# Altium PCB v12.PcbDoc
Units mm, origin at the board's own origin, x right, y up, seen from the top; angles counter-clockwise.
Board outline 50 x 55.55 mm, 2 copper layers (Top Layer, Bottom Layer); 77 components, 53 nets, 241 pads, 42 vias.
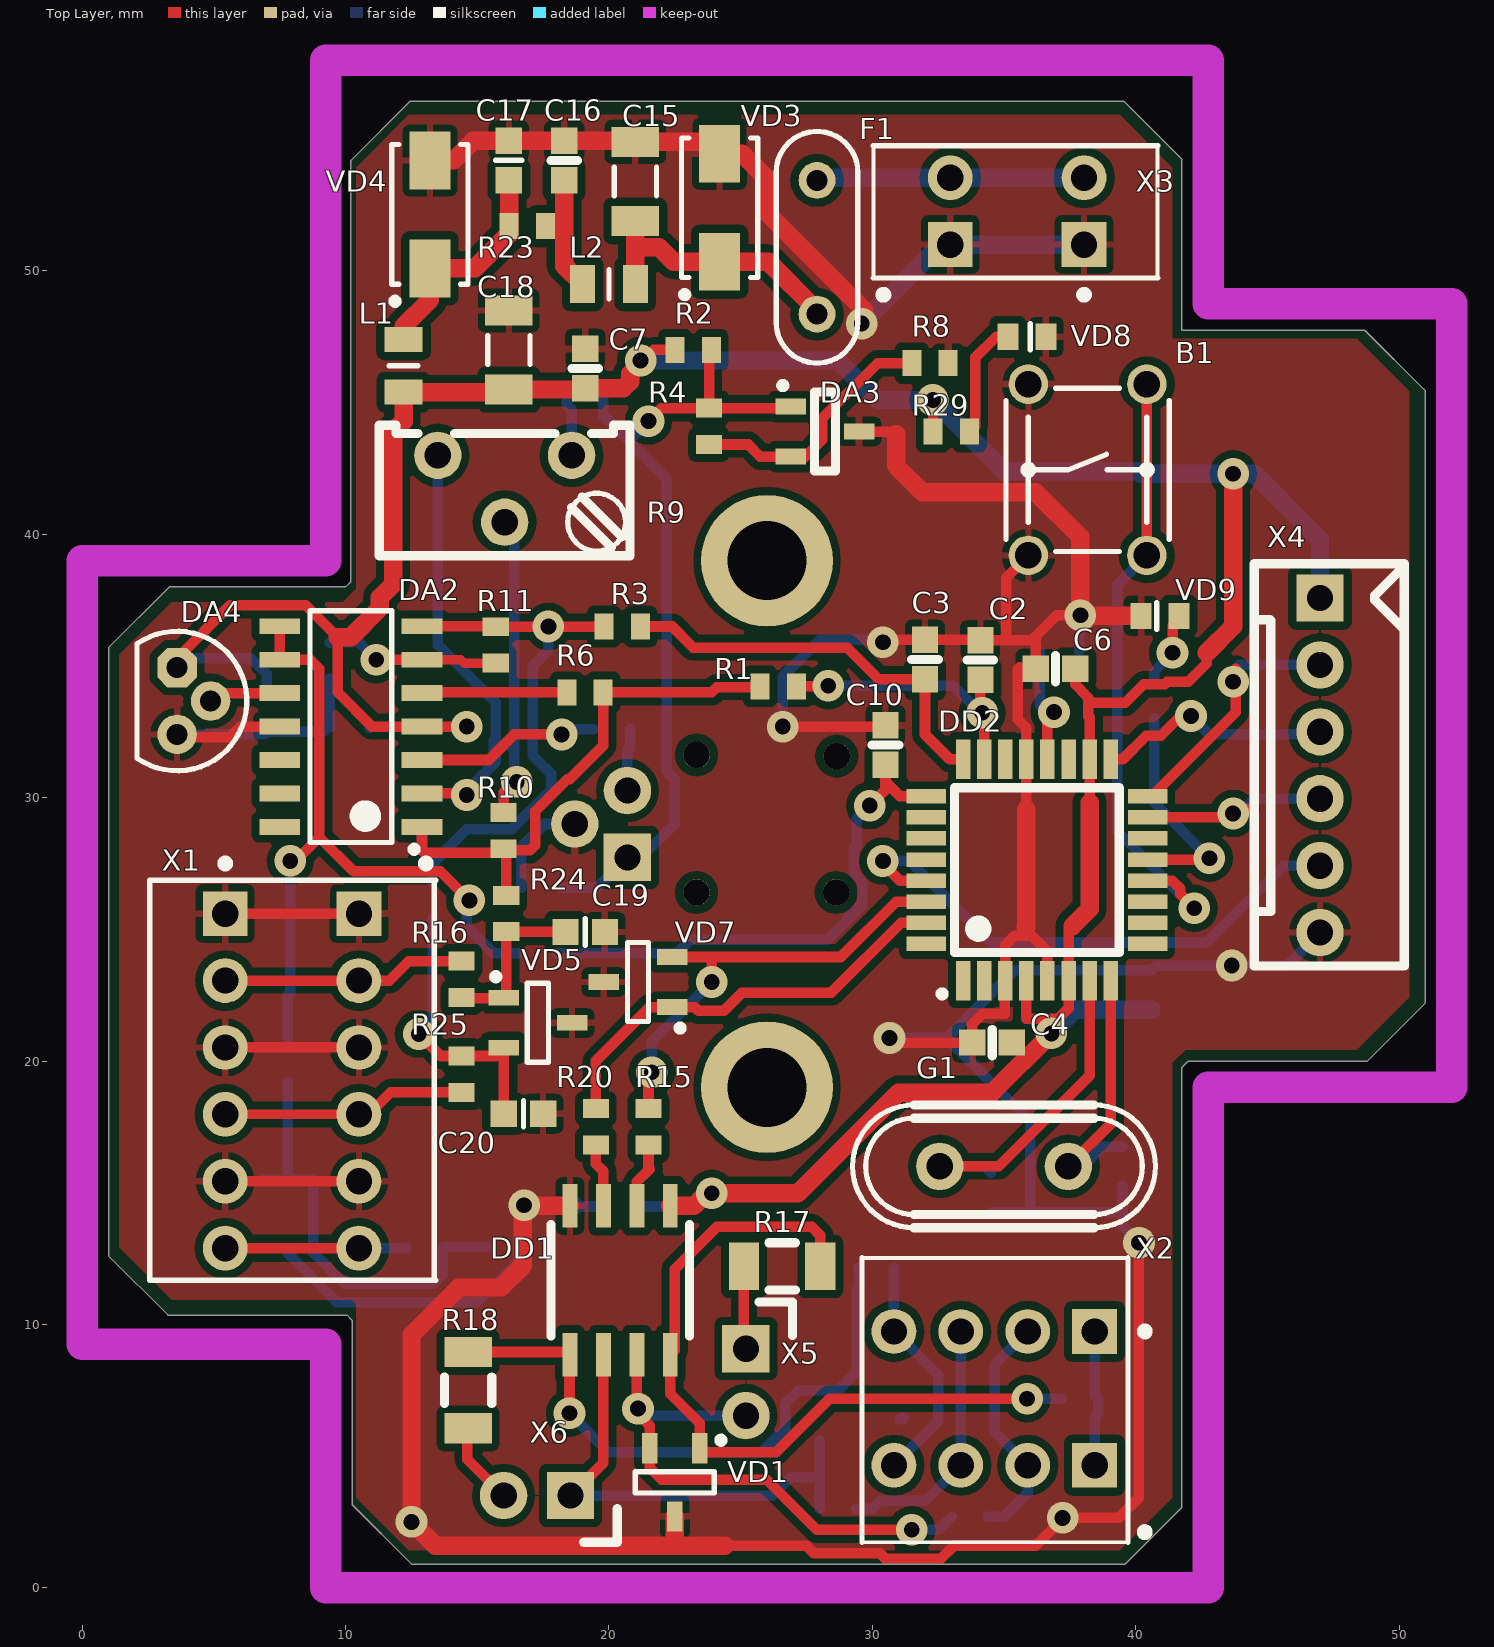
[diagram p0: Top Layer view]
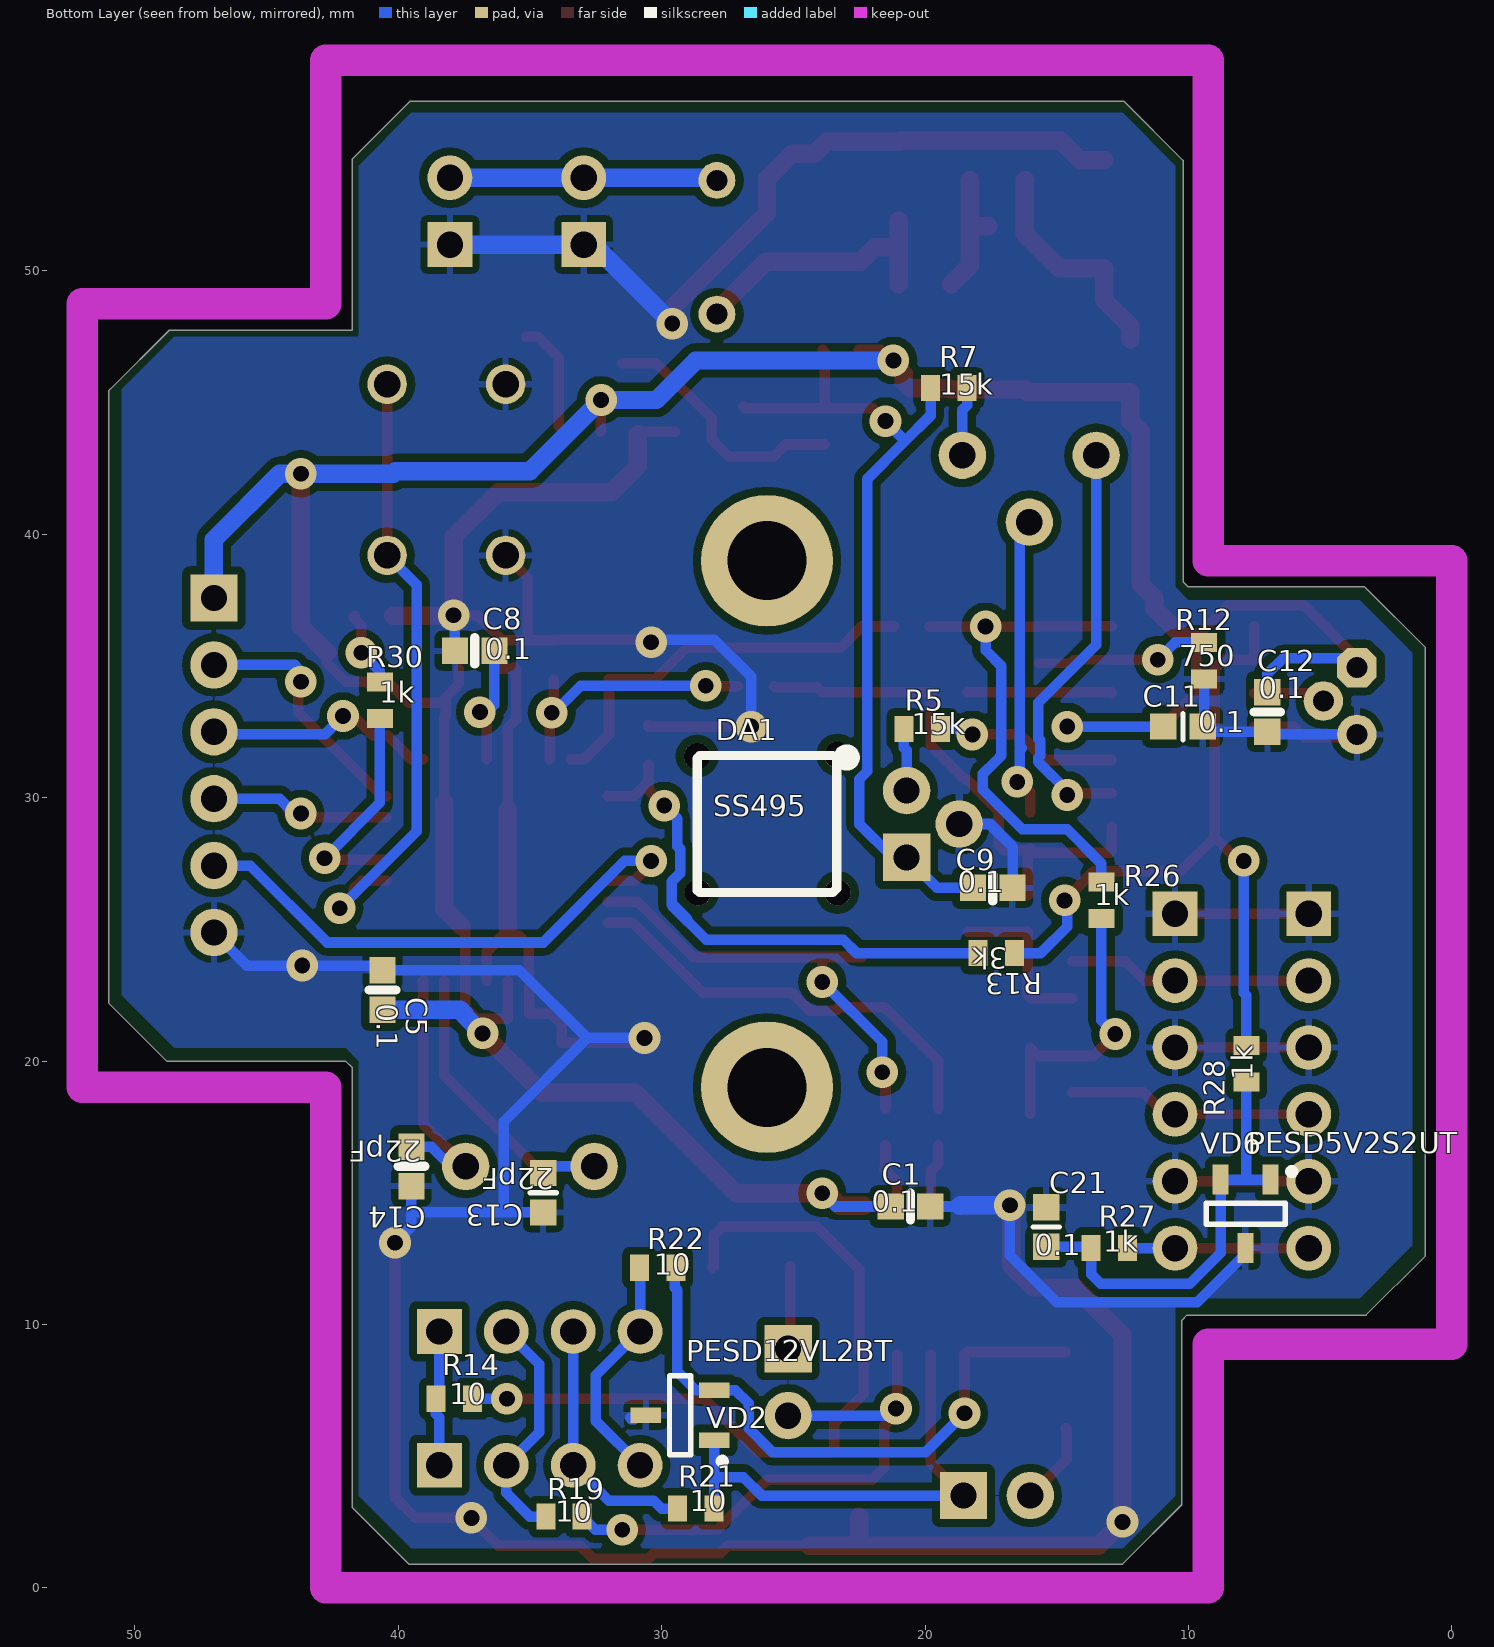
[diagram p1: Bottom Layer view, seen from below]
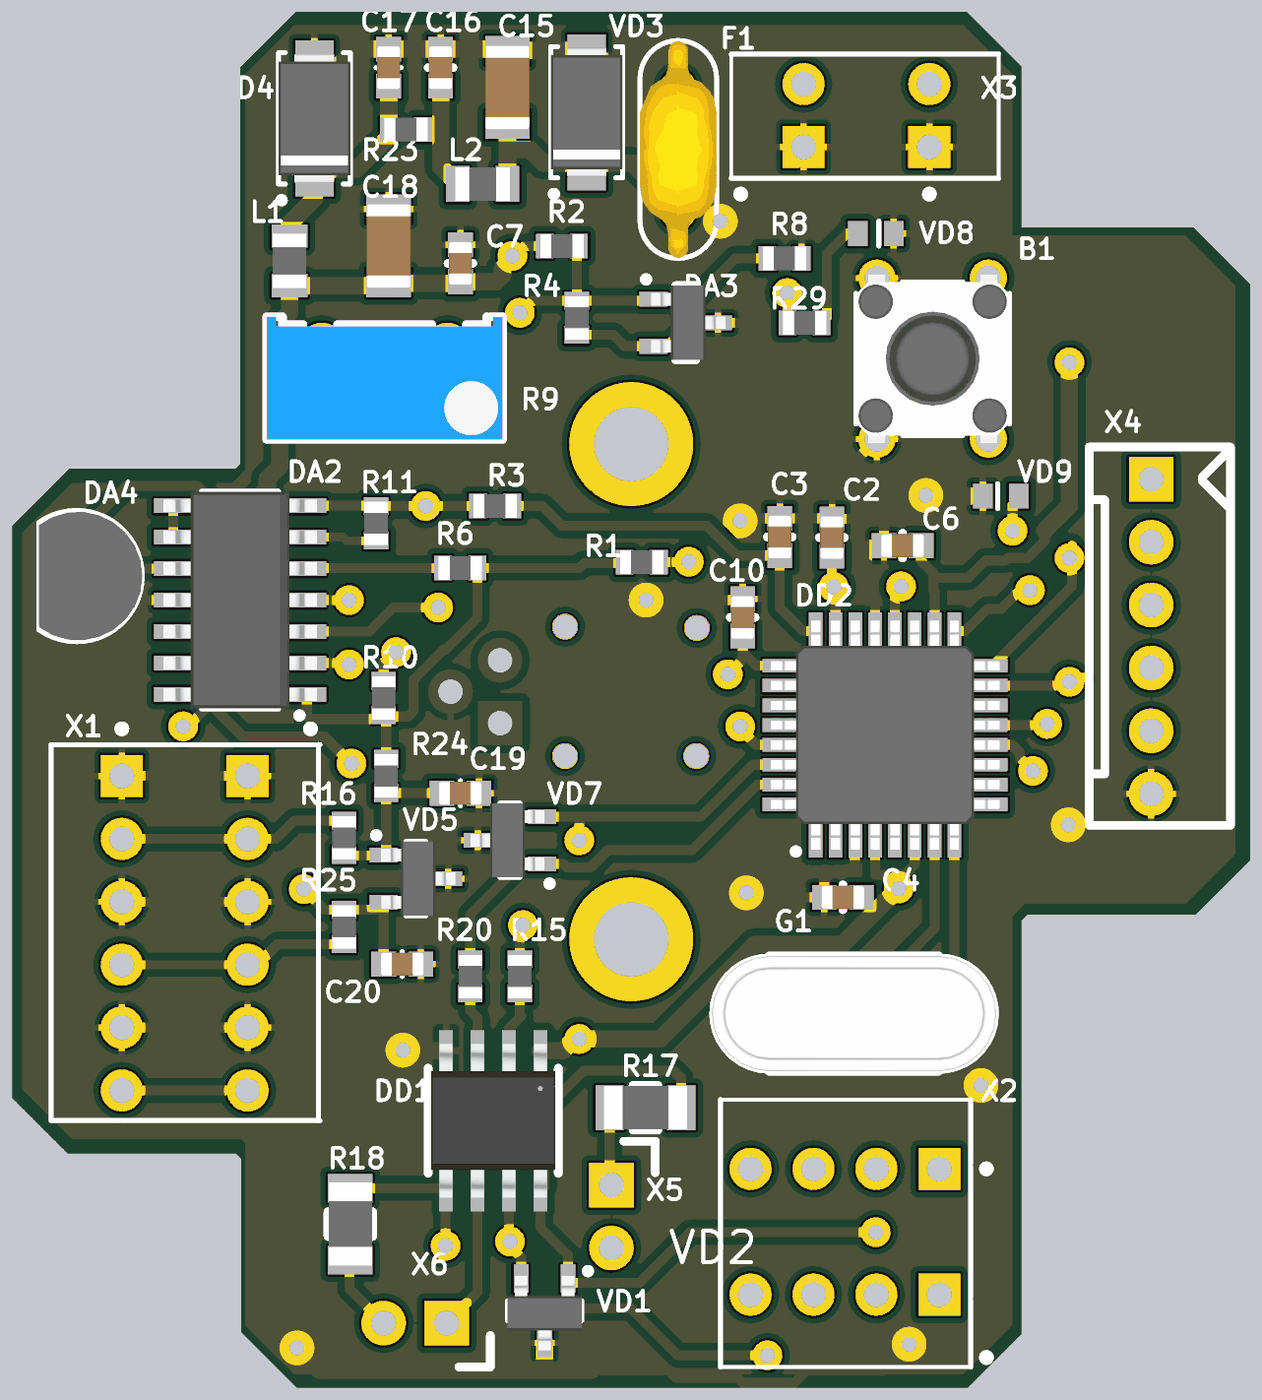
[diagram p2: 3D render of the assembled board from above, using the file's embedded part models]
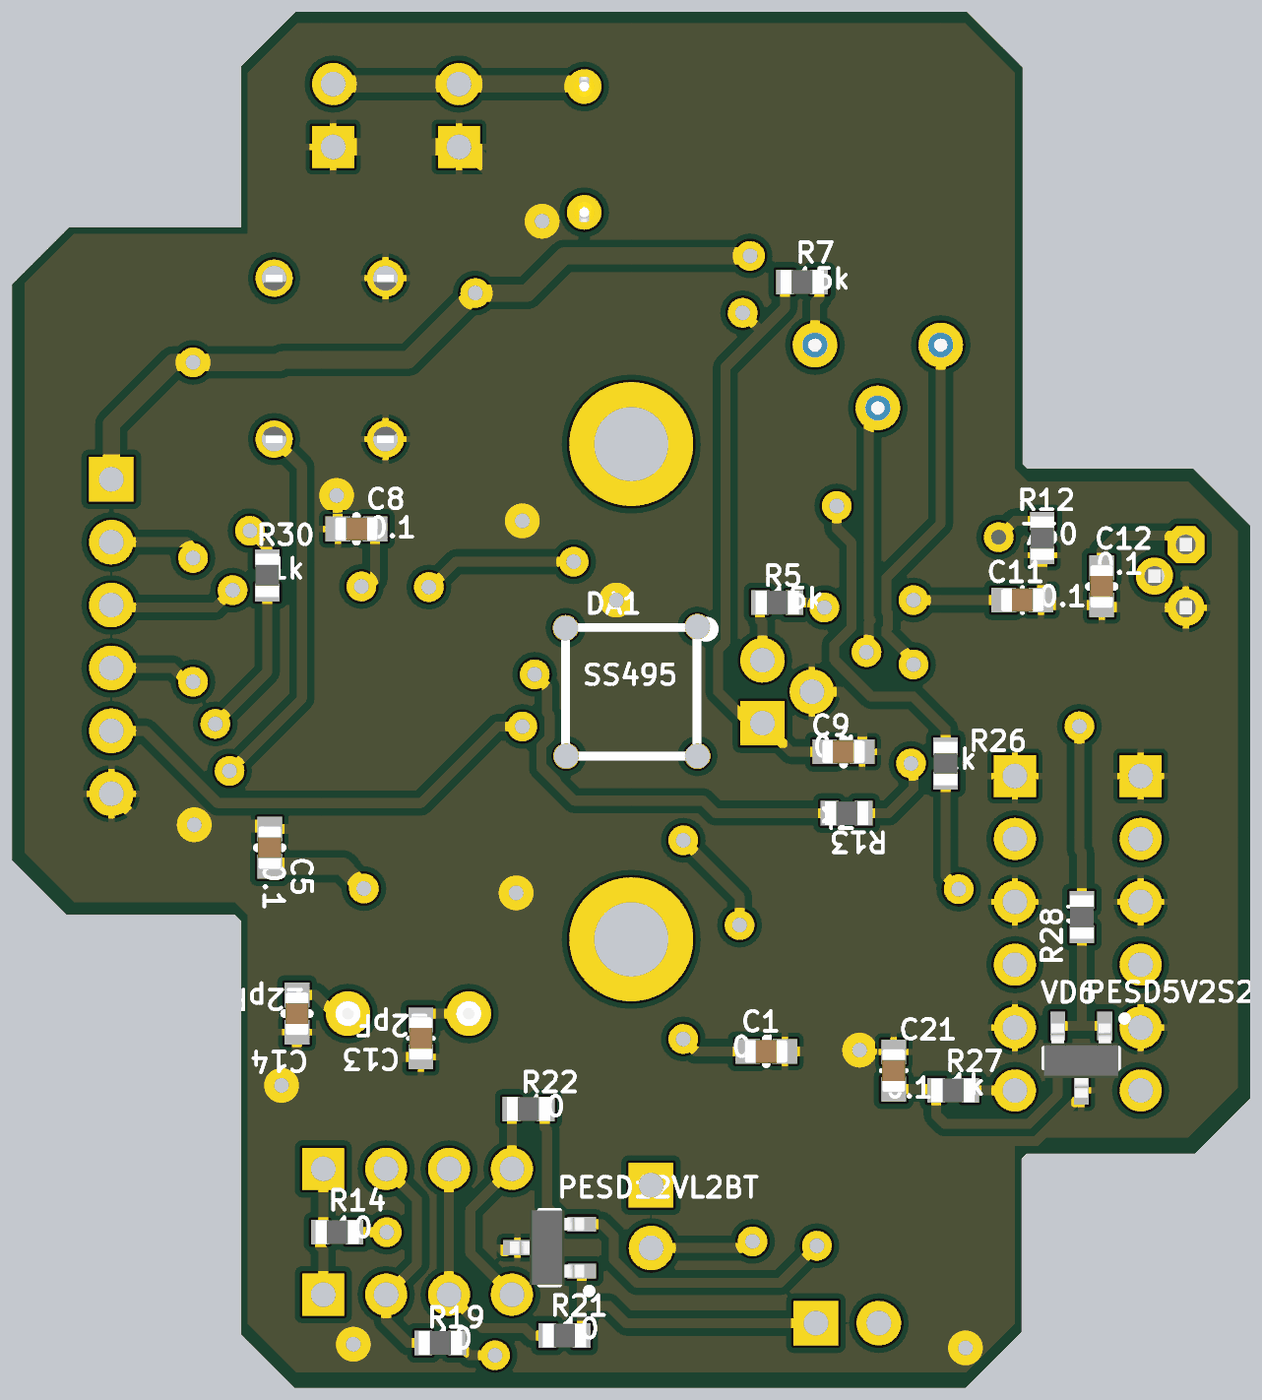
[diagram p3: 3D render of the assembled board from below, using the file's embedded part models]

## Layer stack, top to bottom
Top Solder: solder mask 0.0102, Solder Resist, Dk 3.5
Top Layer: signal copper 0.0356
Dielectric 1: dielectric 0.32, FR-4, Dk 4.8
Bottom Layer: signal copper 0.0356
Bottom Solder: solder mask 0.0102, Solder Resist, Dk 3.5

## Board outline
10.25,3.5 10.25,10.15 10.05,10.35 3.25,10.35 1,12.6 1,35.7 3.25,37.95 3.3,38 10,38 10.2,38.2 10.2,54.2 12.45,56.45 39.546,56.45 41.75,54.246 41.75,47.75 48.7,47.75 50.95,45.5 51,45.45 51,22.2 48.8,20 42,20 41.75,19.75 41.75,3.05 39.6,0.9 12.5,0.9 10.25,3.15

## Design rules (kind name [scope] priority, off if disabled: settings)
Clearance Multy [OnLayer('Multi-Layer')] p1: gap=0.3 ignorepadtopadclearanceinfootprint=TRUE except(0: Arc-Text Arc-Hole Track-Text Track-Hole SMDPad-Text SMDPad-Hole THPad-Text THPad-Hole Via-Text Via-Hole Fill-Text Fill-Hole Poly-Text Poly-Hole Region-Text Region-Hole Text-Text Text-Hole)
Clearance SameBott [All] p2 off: gap=0 ignorepadtopadclearanceinfootprint=TRUE except(0.1: SMDPad-Via THPad-Via Via-Via; 0.5: SMDPad-SMDPad SMDPad-THPad THPad-THPad)
Clearance SameTop [OnLayer('Top Layer') vs OnLayer('Top Layer')] p3 off: gap=0 ignorepadtopadclearanceinfootprint=TRUE except(0.1: SMDPad-Via THPad-Via Via-Via; 0.5: SMDPad-THPad THPad-THPad)
Clearance DiffBott [OnLayer('Bottom Layer') vs OnLayer('Bottom Layer')] p4: gap=0.3 ignorepadtopadclearanceinfootprint=TRUE except(0: Arc-Hole Track-Hole SMDPad-Text SMDPad-Hole THPad-Text THPad-Hole Via-Text Via-Hole Fill-Text Fill-Hole Poly-Text Poly-Hole Region-Text Region-Hole Text-Text Text-Hole; 0.5: SMDPad-SMDPad SMDPad-THPad THPad-THPad)
Clearance DiffTop [OnLayer('Top Layer') vs OnLayer('Top Layer')] p5: gap=0.3 ignorepadtopadclearanceinfootprint=TRUE except(0: Arc-Text Arc-Hole Track-Text Track-Hole SMDPad-Text SMDPad-Hole THPad-Text THPad-Hole Via-Text Via-Hole Fill-Text Fill-Hole Poly-Text Poly-Hole Region-Text Region-Hole Text-Text Text-Hole; 0.5: SMDPad-SMDPad SMDPad-THPad THPad-THPad)
ComponentClearance [InComponent('No Component') And OnLayer('Top Layer') vs InComponent('No Component') And OnLayer('Top Layer')] p1: gap=0.254 collisioncheckmode=3 verticalgap=0.254 showdistances=FALSE
PlaneConnect [All] p1: pad.planeconnectstyle=Relief pad.reliefexpansion=0.508 pad.reliefentries=4 pad.reliefconductorwidth=0.254 pad.reliefairgap=0.254 via.planeconnectstyle=Direct via.reliefexpansion=0.508 via.reliefentries=4 via.reliefconductorwidth=0.254 via.reliefairgap=0.254
PolygonConnect [All] p1: thpad.connectstyle=Relief thpad.reliefconductorwidth=0.254 thpad.reliefentries=4 thpad.polygonreliefangle="90 Angle" thpad.airgapwidth=0.254 smdpad.connectstyle=Relief smdpad.reliefconductorwidth=0.254 smdpad.reliefentries=4 smdpad.polygonreliefangle="90 Angle" smdpad.airgapwidth=0.254 via.connectstyle=Direct via.reliefconductorwidth=0.254 via.reliefentries=4 via.polygonreliefangle="90 Angle" via.airgapwidth=0.254
RoutingVias [All] p1: holewidth=0.6 width=1.2 viastyle="Through Hole" minholewidth=0.6 minwidth=1.2 maxholewidth=1 maxwidth=1.6
SolderMaskExpansion [All] p1: expansion=0.102
Width [All] p1: maxlimit=0.7 minlimit=0.2 preferedwidth=0.4 minimp=50.000000 maximp=50.000000 favimp=50.000000
28 further rules are at their usual default settings.

## Components (designator, comment, footprint, x,y, rotation, side; value= is the part's Value field where it differs from the comment)
B1 "~CALIBRTE" DIP_4-450_PB_OMRON_B3F-1070 38.175,42.45 r270 top locked
C1 "0.1" CAPC1608X85N 20.55,14.475 r0 bottom locked
C2 "0.1" CAPC1608X85N 34.104,35.225 r270 top locked
C3 "0.1" CAPC1608X85N 32,35.25 r270 top locked
C4 "0.1" CAPC1608X85N 34.55,20.7 r0 top locked
C5 "0.1" CAPC1608X85N 40.6,22.7 r270 bottom locked
C6 "0.1" CAPC1608X85N 36.959,34.9 r0 top locked
C7 "0.1" CAPC1608X85N 19.1,46.3 r270 top locked
C8 "0.1" CAPC1608X85N 37.1,35.575 r180 bottom locked
C9 "0.1" CAPC1608X85N 17.425,26.575 r0 bottom locked
C10 "0.1" CAPC1608X85N 30.5,32 r270 top locked
C11 "0.1" CAPC1608X85N 10.2,32.7 r0 bottom locked
C12 "0.1" CAPC1608X85N 7,33.25 r90 bottom locked
C13 "22pF" CAPC1608X85N 34.5,15 r90 bottom locked
C14 "22pF" CAPC1608X85N 39.5,16 r90 bottom locked
C15 "10.0" CAPC3216X152N 21,53.4 r270 top locked
C16 "0.1" CAPC1608X85N 18.3,54.2 r270 top locked
C17 "0.1" CAPC1608X85N 16.2,54.2 r270 top locked
C18 "10.0" CAPC3216X152N 16.2,47 r270 top locked
C19 "0.1" CAPC1608X85N 19.1,24.9 r180 top locked
C20 "0.1" CAPC1608X85N 16.75,18 r180 top locked
C21 "0.1" CAPC1608X85N 15.4,13.7 r270 bottom locked
DA1 "SS495" "TO92H_3-127L - spec1" 26,29 r0 bottom locked
DA2 "AD8544AR" SOIC_14-127 10.2,32.7 r180 top locked
DA3 "TL431DBZ" SOT23-95 28.2,43.9 r0 top locked
DA4 "TMP36" TO-92AA-P127 3.6,33.67 r270 top locked
DD1 "ADM4854" SOIC8 20.425,11.675 r270 top locked
DD2 "ATMEGA8-16AU" TQFP_32-80 36.25,27.25 r90 top locked
F1 "MF-R010" MF-R-508 27.9,50.9 r270 top locked value=10
G1 "12MHz" XTAL_HC-49/U 35,16 r180 top locked
L1 "1k" RESC2012X50N 12.2,46.4 r270 top locked
L2 "1k" RESC2012X50N 20,49.5 r180 top locked
R1 "3k" RESC1608X50N 26.425,34.225 r0 top locked
R2 "20" RESC1608X50N 23.2,47 r180 top locked
R3 "3k" RESC1608X50N 20.5,36.5 r0 top locked
R4 "20k" RESC1608X50N 23.8,44.1 r90 top locked
R5 "15k" RESC1608X50N 20.1,32.6 r180 bottom locked value=15K
R6 "750" RESC1608X50N 19.09,34 r180 top locked
R7 "15k" RESC1608X50N 19.1,45.55 r0 bottom locked
R8 "24k" RESC1608X50N 32.19,46.5 r180 top locked
R9 "2K" TRIM_BOURNS_3296Y 16.04,41.73 r180 top locked
R10 "15k" RESC1608X50N 16,28.75 r270 top locked value=15K
R11 "15k" RESC1608X50N 15.7,35.8 r90 top locked value=15K
R12 "750" RESC1608X50N 9.4,35.2 r90 bottom locked
R13 "3k" RESC1608X50N 17.3,24.1 r0 bottom locked
R14 "10" RESC1608X50N 37.875,7.175 r0 bottom locked
R15 "1k" RESC1608X50N 21.5,17.5 r270 top locked
R16 "1k" RESC1608X50N 14.4,23.1 r270 top locked
R17 "120" RESC3216X65N 26.575,12.2 r180 top locked
R18 "120" RESC3216X65N 14.65,7.5 r270 top locked
R19 "10" RESC1608X50N 33.71,2.7 r0 bottom locked
R20 "1k" RESC1608X50N 19.5,17.5 r270 top locked
R21 "10" RESC1608X50N 28.7,3 r0 bottom locked
R22 "10" RESC1608X50N 30.15,12.15 r0 bottom locked
R23 "1" RESC1608X50N 16.9,51.7 r0 top locked
R24 "1k" RESC1608X50N 16.1,25.6 r90 top locked
R25 "1k" RESC1608X50N 14.4,19.5 r90 top locked
R26 "1k" RESC1608X50N 13.3,26.1 r90 bottom locked
R27 "1k" RESC1608X50N 13,12.9 r0 bottom locked
R28 "1k" RESC1608X50N 7.8,19.9 r90 bottom locked
R29 "1k" RESC1608X50N 33,43.9 r180 top locked
R30 "1k" RESC1608X50N 40.7,33.7 r90 bottom locked
VD1 "PESD12VL2BT" SO23-95 22.5,4 r270 top locked value=12V
VD2 "PESD12VL2BT" SO23-95 29.3,6.55 r0 bottom locked value=12V
VD3 "B330LA-M3" DO214 24.2,52.4 r90 top locked
VD4 "SMBJ5.0A" DO214 13.2,52.15 r90 top locked value=5.0
VD5 "PESD5V2S2UT" SO23-95 17.3,21.45 r0 top locked value=5V2
VD6 "PESD5V2S2UT" SO23-95 7.825,14.2 r270 bottom locked value=5V2
VD7 "PESD5V2S2UT" SO23-95 21.1,23 r180 top locked value=5V2
VD8 "PWR" LED0603 36,47.5 r180 top locked
VD9 "HB" LED0603 40.8,36.9 r0 top locked
X1 "AnalogOut" DIP_CLEMM_6-254_F 7.965,25.595 r270 top locked
X2 "RS422" DIP_CLEMM_4-254_F 38.44,7.19 r180 top locked
X3 "5V_IN" DIP_CLEMM_2-254_F 35.5,51 r90 top locked
X4 "WF6Debug/Prog" SIP_6-254 47,37.58 r180 top locked value=Debug/Prog
X5 "Termintor RX" DIP_2-254_WO_CASE 25.2,9.075 r270 top locked
X6 "Termintor TX" DIP_2-254_WO_CASE 18.54,3.5 r180 top locked

## Footprints (in the part's own frame and the unit in brackets; to place one, negate y for a bottom-side part, rotate by r counter-clockwise, add the part's x,y. Pads: shape width x height; smd on the part's side, far side on the other; paste and mask are expansions set on the pad)
CAPC1608X85N [mm] "Chip Capacitor, Body 1.6x0.8mm IPC Medium Density"
  rect 1x1 smd: 1(-0.75,0) 2(0.75,0)
  silkscreen extent 0,-0.5 0,0.5, body extent -0.87,-0.47 0.88,0.48, height 0.85
CAPC3216X152N [mm] "Chip Capacitor, Body 3.2x1.6mm, IPC Medium Density"
  rect 1.15x1.8 smd: 1(-1.5,0) 2(1.5,0)
  silkscreen extent -0.55,-0.8 0.55,0.8, body extent -1.7,-0.9 1.7,0.9, height 1.52
DIP_2-254_WO_CASE [mm] "2.54mm pitch 2pin M connnector"
  rect 1.8x1.8 hole 1: 1(0,0)
  round 1.8 hole 1: 2(2.54,0)
  silkscreen extent -1.77,0.5 -0.5,1.77, body extent -1.27,-1.27 3.81,1.27, height 9
DIP_4-450_PB_OMRON_B3F-1070 [mm] "6x6mm Model, Horizontal, Flat Plunger Type (without Ground Terminal) Pushbutton Switch, OMRON B3F Series"
  round 1.5 hole 1: 1(-3.25,2.25) 1(3.25,2.25) 2(-3.25,-2.25) 2(3.25,-2.25)
  silkscreen extent -3.1,-3.1 3.1,3.1, body extent -3.4,-3.1 3.4,3.1, height 9.5
DIP_CLEMM_2-254_F [mm] "2 pin terminal spring clamp 2.54mm pitch"
  rect 1.7x1.7 hole 1: 1(0,2.54) 1(0,-2.54)
  round 1.7 hole 1: 2(2.54,-2.54) 2(2.54,2.54)
  silkscreen extent -2.05,-5.34 3.76,5.46, body extent -1.27,-5.36 3.76,5.46, height 13.6
DIP_CLEMM_4-254_F [mm] "4 pin terminal spring clamp 2.54mm pitch"
  rect 1.7x1.7 hole 1: 1(0,2.54) 1(0,-2.54)
  round 1.7 hole 1: 2(2.54,2.54) 2(2.54,-2.54) 3(5.08,-2.54) 3(5.08,2.54) 4(7.62,-2.54) 4(7.62,2.54)
  silkscreen extent -2.05,-5.34 8.84,5.46, body extent -1.27,-5.38 8.84,5.46, height 13.6
DIP_CLEMM_6-254_F [mm] "6 pin terminal spring clamp 2.54mm pitch"
  rect 1.7x1.7 hole 1: 1(0,2.54) 1(0,-2.54)
  round 1.7 hole 1: 2(2.54,2.54) 2(2.54,-2.54) 3(5.08,2.54) 3(5.08,-2.54) 4(7.62,-2.54) 4(7.62,2.54) 5(10.16,-2.54) 5(10.16,2.54) 6(12.7,-2.54) 6(12.7,2.54)
  silkscreen extent -2.05,-5.4 13.92,5.46, body extent -1.27,-5.4 13.92,5.46, height 13.6
DO214 [mm] "DO-214-AC/SMA  Molded Diode, Body 5.0x2.7mm, IPC Medium Density"
  rect 2.2x1.55 smd: 1(-2.05,0) 2(2.05,0)
  silkscreen extent -3.42,-1.45 2.65,1.45, body extent -2.6,-1.45 2.6,1.45, height 2.44
LED0603 [mm] "Chip LED 0603, Body 2.25x1mm"
  rect 0.8x1 smd: 1(-0.6,0) 2(0.85,0)
  silkscreen extent 0,-0.5 0,0.5, body extent -1.1,-0.48 1.12,0.48, height 0.95
MF-R-508 [mm] "PTC Resettable Fuse, MF-R Series, Case style 4"
  round 1.4 hole 0.8: 1(-2.54,0) 2(2.54,0)
  silkscreen extent -4.4,-1.55 4.4,1.55, body extent -4.38,-1.55 4.38,1.55, height 8.3
RESC1608X50N [mm] "Chip Resistor, EIA 0603, Metric 1608, Body 1.6x0.8mm, IPC Medium Density"
  rect 0.72x0.99 smd: 1(-0.69,0) 2(0.69,0)
  body extent -0.87,-0.47 0.88,0.48, height 0.5
RESC2012X50N [mm] "Chip Resistor, EIA 0805, Metric 2012, Body 2.0x1.25mm, IPC Medium Density"
  rect 0.95x1.45 smd: 1(-1,0) 2(1,0)
  silkscreen extent 0,-0.55 0,0.55, body extent -1.1,-0.67 1.1,0.68, height 0.5
RESC3216X65N [mm] "Chip Resistor, EIA 1206, Metric 3216, Body 3.2x1.6mm, IPC Medium Density"
  rect 1.15x1.8 smd: 1(-1.45,0) 2(1.45,0)
  silkscreen extent -0.5,-0.9 0.5,0.9, body extent -1.67,-0.87 1.68,0.88, height 0.65
SIP_6-254 [mm] "2.54mm pitch 6pin M connnector"
  rect 1.8x1.8 hole 1: 1(0,0)
  round 1.8 hole 1: 2(0,2.54) 3(0,5.08) 4(0,7.62) 5(0,10.16) 6(0,12.7)
  silkscreen extent -3.2,-1.3 2.5,13.97, body extent -3.17,-1.3 2.58,13.95, height 9
SO23-95 [mm] "SOT23, 0.95mm, pitch;3 pin,1.55mm W X 2.95mm L X 1.15mm H body, IPC Medium Density"
  rect 1.15x0.6 smd: 1(-1.3,0.95) 2(-1.3,-0.95) 3(1.3,0)
  silkscreen extent -1.72,-1.5 0.4,1.88, body extent -1.4,-1.5 1.6,1.5, height 1.15
SOIC8 [mil] "1.27mm pitch 8pin = D8_TEX-M(ti)"
  rect 65.5x22 smd paste+0 mask+0: 1(-111.25,75) 2(-111.25,25) 3(-111.25,-25) 4(-111.25,-75) 5(111.25,-75) 6(111.25,-25) 7(111.25,25) 8(111.25,75)
  silkscreen extent -84,-104 84,104, body extent -122,-99 122,99, height 69
SOIC_14-127 [mm] "SOIC 14, Pitch 1.27mm - Body 4x8.75mm, IPC Medium Density"
  rect 1.55x0.6 smd: 1(-2.7,3.81) 2(-2.7,2.54) 3(-2.7,1.27) 4(-2.7,0) 5(-2.7,-1.27) 6(-2.7,-2.54) 7(-2.7,-3.81) 8(2.7,-3.81) 9(2.7,-2.54) 10(2.7,-1.27) 11(2.7,0) 12(2.7,1.27) 13(2.7,2.54) 14(2.7,3.81)
  silkscreen extent -2.53,-4.4 1.55,4.78, body extent -3.1,-4.37 3.1,4.38, height 1.75
SOT23-95 [mm] "SOT23, 0.95mm, pitch;3 pin,1.55mm W X 2.95mm L X 1.15mm H body, IPC Medium Density"
  rect 1.15x0.6 smd: 1(-1.3,0.95) 2(-1.3,-0.95) 3(1.3,0)
  silkscreen extent -1.72,-1.5 0.4,1.87, body extent -1.4,-1.5 1.6,1.5, height 1.15
"TO92H_3-127L - spec1" [mm] "TO92Horisontal"
  rect 1.8x1.8 hole 1 unplated: 1(-5.3,1.27)
  round 1.8 hole 1 unplated: 2(-7.3,0) 3(-5.3,-1.27)
  silkscreen extent -3.27,-2.77 2.65,2.6, body extent -7.55,-2.66 2.63,2.63, height 1.6
TO-92AA-P127 [mm] "TO-92 (TO-226),  Pitch 1.27mm, Flat Index, 3 In-Line, Axial Leads, Body Dia. 5.3mm, Leads Dia. 0.5mm (max)"
  oct 1.5x1.5 hole 0.8: 1(-1.27,0)
  round 1.5 hole 0.8: 2(0,1.27) 3(1.27,0)
  silkscreen extent -2.65,-1.52 2.65,4.1, body extent -2.58,-1.53 2.58,2.64, height 9.33
TQFP_32-80 [mm] "QFP,0.80mm Pitch, Square; 32 Pin, 7.00mm L X 7.00mm W X 1.20mm H Body, IPC Medium Density"
  rect 1.5x0.55 smd: 1(-4.2,2.8) 2(-4.2,2) 3(-4.2,1.2) 4(-4.2,0.4) 5(-4.2,-0.4) 6(-4.2,-1.2) 7(-4.2,-2) 8(-4.2,-2.8) 17(4.2,-2.8) 18(4.2,-2) 19(4.2,-1.2) 20(4.2,-0.4) 21(4.2,0.4) 22(4.2,1.2) 23(4.2,2) 24(4.2,2.8)
  rect 0.55x1.5 smd: 9(-2.8,-4.2) 10(-2,-4.2) 11(-1.2,-4.2) 12(-0.4,-4.2) 13(0.4,-4.2) 14(1.2,-4.2) 15(2,-4.2) 16(2.8,-4.2) 25(2.8,4.2) 26(2,4.2) 27(1.2,4.2) 28(0.4,4.2) 29(-0.4,4.2) 30(-1.2,4.2) 31(-2,4.2) 32(-2.8,4.2)
  silkscreen extent -4.82,-3.13 3.13,3.72, body extent -4.62,-4.62 4.62,4.62, height 1.2
TRIM_BOURNS_3296Y [mm] "Trimming Potentiometer BOURNS 3296Y Series"
  round 1.8 hole 1: 1(-2.54,-1.27) 2(0,1.27) 3(2.54,-1.27)
  silkscreen extent -4.76,-2.41 4.76,2.54, body extent -4.76,-2.41 4.77,2.55, height 11.55
XTAL_HC-49/U [mm] "HC-49/U Leaded Cristal, Body 11.05x4.8mm; Pitch 4.88mm"
  round 1.8 hole 1: 1(-2.44,0) 2(2.44,0)
  silkscreen extent -5.75,-2.33 5.75,2.33, body extent -5.75,-2.33 5.75,2.33, height 3.5

## Part data
B1: library part PushBt, "Push button wo latch", Package=DIP4-450, Unit Price=0.1, Vendor=Vishay
C1 C2 C3 C4 C5 C6 C7 C8 C9 C10 C11 C12 C13 C14 C16 C17 C19 C20 C21: library part CAP00603, "Chip capasitor 0603", Package=0603, Unit Price=0.1, Vendor=Vishay
  C1 C2 C3 C4 C5 C6 C7 C8 C9 C10 C11 C12 C16 C17 C19 C20 C21: Descr="Chip capasitor 0603", Group=Passive
C15 C18: library part CAP1206, "Chip capasitor 1206", Package=SMD1206, Unit Price=0.1, Vendor=Vishay
DA1: "10mV / C Temperature sensor", Package=TO92-H-spec1, Device=SS495, Unit Price=3, Vendor=Honeywell
DA2: "Quad rail to rail i&O OpAmp. 2V7-5V 5 Single power supply. MOSFET in. SOIC14 Package", PPackage=SOIC14, Device=AD8544AR, Unit Price=0.2, Vendor="Analog Devices Inc"
DA3: "Adjustable voltage reference", Package=SOT23, Device=TL431DBZ, Unit Price=1, Vendor=TI
DA4: library part TMP36v, "10mV / C Temperature sensor", Package=TO92-V, Device=TMP36, Unit Price=1, Vendor="Analog Devices inc."
DD1: "Full Duplex RS-422 Transceivers", Package=SOIC8, Device=ADM4854, Unit Price=1, Vendor="Analog Devices Inc"
DD2: "8bit uController"
F1: library part MF-R-0, "Fuse", Device=MF-R0, Paccage=SIP_2-508, Unit Price=0,3, Vendor=Bourns
G1: library part HC49U, "Quartz resonator", Package=XTAL-HC49, Unit Price=0.5, Vendor=Vishay
L1 L2: library part BLM21, "SMD Ferrite bead 0805", Package=SMD0805, Device=BLM21, Unit Price=0.1, Vendor=Vishay
R1 R2 R3 R4 R5 R6 R7 R8 R10 R11 R12 R13 R14 R15 R16 R19 R20 R21 R22 R23 R24 R25 R26 R27 R28 R29 R30: library part Res0603, "Chip resistor 0603", Package=SMD0603, Descr="Chip resistor 0603", Group=Passive, Unit Price=0.005, Vendor=Vishay
R9: library part 3296, "Trimm Resistor", Package=Trimm3296, Descr="Chip resistor 0805", Group=Passive, Unit Price=0.2, Vendor=BOURNS
R17 R18: library part Res1206, "Chip resistor 1206", Package=SMD1206, Unit Price=0.005, Vendor=Vishay
VD1 VD2: library part PESDxxL2BT, "Low capacitance double bidirectional ESD protection diodes in SOT23", Package=SOT23, Device=PESD, Unit Price=0.5, Vendor=NXP
VD3: "3A 40V Schottky Diode", Package=DO214, Device=B330LA-M3, Unit Price=0.2, Vendor=Vishay
VD4: library part SMBJxxA, "TVS surface mount diode", Package=DO214, Device=SMBJ, Unit Price=1, Vendor=Littelfuse
VD5 VD6 VD7: library part PESDxxS2UT, "Low capacitance double  ESD protection diodes in SOT23", Package=SOT23, Device=PESD, Unit Price=0.5, Vendor=NXP
VD8: library part L-KLS9-T0603, "Chip LED SMD 0603", Color=RED, Package=SMD0603, Device=L-KLS9, Unit Price=0.1, Vendor="NINGBO KLS ELECTRONIC CO LTD"
VD9: library part L-KLS9-T0603, "Chip LED SMD 0603", Color=GREEN, Package=SMD0603, Device=L-KLS9, Unit Price=0.1, Vendor="NINGBO KLS ELECTRONIC CO LTD"
X1: library part DG141-6, "6 pin terminal spring clamp 2.54mm pitch", Device=DG141-6, Pckage="DIP6- 2.54x5.12", Unit Price=0.6, Vendor=Degson
X2: library part DG141-4, "4 pin terminal spring clamp 2.54mm pitch", Device=DG141-4, Pckage="DIP- 2.54x5.12", Unit Price=0.4, Vendor=DEGSON
X3: library part DG141-2, "2 pin terminal spring clamp 2.54mm pitch", Device=DG141-2, Pckage="DIP- 2.54x5.12", Unit Price=0.2, Vendor=DEGSON
X4: library part WF6, "6 pin TRH connector 2.54mm pitch", Device=WF6, Pckage="SIP_6- 2.54", Unit Price=0.2, Vendor=Connfly
X5 X6: library part PLD2, "2 pin TRH connector 2.54mm pitch", Device=PLD2, Pckage="DIP2- 2.54", Unit Price=0.2, Vendor=Connfly

## Free pads (board coordinates)
  round 1 hole 1: 0(23.325,31.625) 4(28.65,31.575) 5(28.625,26.4) 6(23.325,26.4)
  round 5 hole 3: 0(26,19) 0(26,39)

## Via types
v1: diameter 1.2, hole 0.6, Top Layer to Bottom Layer, 42 vias

## Nets (pads, with @x,y where several pads share a name; then routed paths per layer and width w, separated by ;. In a path a pad name is that pad's centre, name@x,y a point inside that pad or via, vN(x,y) a via of type N, cw(c..) or ccw(c..) an arc to the next point about the centre after c; other vN are vias at no path point)
5V: C1.2 C4.2 C5.2 C6.2 C7.2 C11.2 C12.2 C18.2 DA2.4 DA4.1 DD1.1 DD2.4 DD2.6 DD2.18 L1.2 R2.2 R29.2 X4.1 | length 129.4
  Top Layer w0.4: DA4.1 3.6,35.3 5.61,37.31 8.482,37.31 9.7,36.092 9.7,34 11,32.7 DA2.4 v1(14.6,32.7) ; 21.7,47 R2.2 ; v1(32.3,45.1) 32.31,45.09 R29.2 ; DD2.4 35.85,21.6 37.05,21.6 37.45,22 DD2.6 37.45,24.975 37.6,25.125 ; C6.2 37.7,34.891 37.7,34.3 38.2,33.8 38.2,33.1 38.25,33.05 DD2.18 38.25,29.8 ; 38.35,33.6 39.6,33.6 40.3,34.3 41.1,34.3 41.2,34.4 42,34.4 42.7,35.1 42.7,35.5
  Top Layer w0.7: 9.7,36.092 10.192,36.092 11.3,37.2 11.3,37.6 11.8,38.1 11.8,43.9 12.2,44.3 L1.2 16.1,45.4 C18.2 19.05,45.5 C7.2 20.55,45.55 20.8,45.8 20.8,46.1 ; DD1.1@22.331,14.5 23.225,14.5 v1@23.6,14.875 ; v1(23.901,14.976) 27.176,14.976 31,18.8 34.55,18.8 v1(36.8,21.05) ; 37.6,25.125 38.25,25.775 38.25,29.8 ; 42.7,35.5 43.7,36.5 v1(43.7,42.3)
  Bottom Layer w0.4: DA4.1 3.96,35.3 6.4,35.3 7,34.7 C12.2 ; C11.2@10.9,32.65 C11.2 v1(14.6,32.7) ; C1.2 23.4,14.475 v1(23.901,14.976) ; v1(36.8,21.05) v1@36.95,20.9
  Bottom Layer w0.7: v1(21.2,46.6) 28.7,46.6 30.2,45.1 v1(32.3,45.1) 35,42.4 40.1,42.4 40.2,42.3 v1(43.7,42.3) 44.5,42.3 47,39.8 X4.1 ; v1(36.8,21.05) 37.5,21.75 37.5,21.8 37.65,21.95 C5.2
-Reset: DD2.29 X4.5 | length 21.1
  Top Layer w0.4: v1(30.4,27.595) 30.4,27.5 31.05,26.85 DD2.29
  Bottom Layer w0.4: v1(30.4,27.595) 30.405,27.6 31.4,27.6 34.5,24.5 42.7,24.5 45.62,27.42 X4.5
GND: B1.2 C1.1 C2.1 C3.1 C4.1 C5.1 C6.1 C7.1 C8.1 C9.1 C10.1 C11.1 C12.1 C13.1 C14.1 C15.1 C16.1 C17.1 C18.1 C19.1 C20.1 C21.1 DA1.2 DA2.11 DA3.3 DA4.3 DD1.4 DD2.3 DD2.5 DD2.21 R8.1 R12.1 VD1.3 VD2.3 VD3.2 VD4.2 VD5.3 VD6.3 VD7.3 VD8.1 VD9.1 X1.1 X1.3 X1.5 X3.1 X4.6 | length 230.9
  Top Layer w0.2: 30.9,43.8 30.9,43.9
  Top Layer w0.4: DA4.3 3.7,32.3 5.6,32.3 6,32.7 DA2.11 ; X1.5@5.425,15.435 X1.5@10.505,15.435 ; X1.3@5.425,20.515 X1.3@10.505,20.515 ; X1.1@5.425,25.595 X1.1@10.505,25.595 ; 24.4,1.6 27.5,1.6 27.8,1.3 30.3,1.3 30.5,1.1 32.6,1.1 33.1,1.6 36.2,1.6 37.225,2.625 v1(37.225,2.65) 39.35,2.65 40.125,3.425 v1(40.125,13.1) ; v1(26.6,32.7) 30.5,32.7 C10.1 ; DA3.3 30.9,43.9 ; v1(30.4,35.9) 30.5,36 C3.1 34.079,36 C2.1 36.05,35.975 36.209,36.134 ; v1(30.65,20.875) 30.825,20.7 C4.1 33.8,21.35 33.775,21.375 34.2,21.8 35.025,21.8 35.025,23.025 DD2.3 35.05,24.4 35.4,24.75 35.825,24.75 ; 35.079,36 35.079,38.354 B1.2@35.925,39.2 ; 35.85,29.55 DD2.21 35.85,32.65 35.525,32.975 35.525,34.875 35.6,34.95 35.65,34.9 C6.1 36.209,36.134 ; 36.05,24.75 36.65,24.15 DD2.5 ; v1(37.9,36.925) 37,36.925 36.209,36.134
  Top Layer w0.7: VD4.2 14.1,54.2 14.85,54.95 C17.1 C16.1 20.95,54.95 C15.1 23.75,54.9 VD3.2 25.05,54.45 26,53.5 26,52.2 29.7,48.5 29.7,47.9 v1(29.6,48) ; DD1.4 16.726,14.501 16.726,12.226 15.9,11.4 14.3,11.4 12.5,9.6 v1(12.5,2.5) 13.4,1.6 22.5,1.6 ; VD1.3 22.5,1.6 ; 24.4,1.6 22.5,1.6 ; 30.9,43.8 30.9,42.6 31.9,41.6 36.2,41.6 37.9,39.9 v1(37.9,36.925) 37.925,36.9 VD9.1 ; 35.825,25.075 35.85,25.1 35.85,29.55
  Bottom Layer w0.4: DA4.3 6.9,32.4 C12.1 9.15,32.5 C11.1@9.4,32.75 ; X1.5@5.19,15.2 5.425,15.435 X1.5@5.425,15.075 ; VD6.3@7.8,12.9 VD6.3 7.825,12.676 9.656,10.845 15.002,10.845 16.775,12.618 v1(16.775,14.525) ; R12.1 C11.1@9.4,32.75 ; C11.1 C11.1@9.4,32.75 ; X1.5@10.505,15.435 X1.5@10.82,15.75 ; C9.1 16.675,28.125 17.55,29 DA1.2 ; 18.675,14.5 18.7,14.475 C1.1 ; v1(26.6,32.7) 26.6,34.6 28,36 30.6,36 30.5,35.9 v1(30.4,35.9) ; v1(30.65,20.875) 32.825,20.875 ; VD2.3@31.042,6.4 31.15,6.4 31.2,6.45 ; C13.1 36,14.25 ; C8.1 37.85,36.875 v1(37.9,36.925) ; C14.1 39.5,14.4 ; v1(40.125,13.1) 39.5,13.725 39.5,14.4 ; X4.6 45.745,23.625 v1(43.65,23.625) 40.775,23.625 C5.1 35.4,23.45 32.825,20.875 ; 32.825,20.875 36,17.7 36,14.25 ; 36,14.25 39.35,14.25 39.5,14.4
  Bottom Layer w0.7: v1(16.775,14.525) 18.65,14.525 18.675,14.5 ; v1(29.6,48) 32.6,51 32.96,51 X3.1@38.04,51
NetB1_1: B1.1 DD2.12 | length 23.9
  Top Layer w0.4: B1.1@40.425,39.2 B1.1@40.425,45.7 ; DD2.12 41.382,26.85 41.7,26.532 41.7,26.325 v1(42.225,25.8)
  Bottom Layer w0.4: B1.1@40.425,39.2 39.3,38.075 39.3,28.725 v1(42.225,25.8)
NetC2_2: C2.2 DD2.23 R1.2 | length 10.4
  Top Layer w0.4: R1.2 28.175,34.225 28.2,34.25 v1(28.325,34.25) v1@28.35,34.25 ; v1@34.1,33.225 34.1,34.471 C2.2 ; DD2.23 v1@34.25,33.075
  Bottom Layer w0.4: v1(28.325,34.25) 33.075,34.25 34.1,33.225 v1(34.175,33.225)
NetC3_2: C3.2 DD2.24 R3.2 | length 15.6
  Top Layer w0.4: R3.2 22.4,36.5 23.2,35.7 29.044,35.7 30.244,34.5 C3.2 32,32.4 32.95,31.45 DD2.24
NetC8_2: C8.2 DD2.20 | length 4.2
  Top Layer w0.4: DD2.20 v1@36.65,33.225
  Bottom Layer w0.4: C8.2 36.35,33.525 v1@36.65,33.225
  other v1: 36.9,33.25
NetC9_2: C9.2 DA1.1 DA3.1 R2.1 R4.2 R7.2 | length 32.5
  Top Layer w0.4: DA1.1@20.2,27.7 20.67,27.7 DA1.1 ; v1(21.5,44.3) 21.99,44.79 R4.2 ; R2.1 23.8,46.91 R4.2 ; DA3.1 26.84,44.79 R4.2
  Bottom Layer w0.4: C9.2 19.545,26.575 DA1.1 21.23,27.73 22.5,29 22.5,30.7 22.2,31 22.2,42.1 20.8,43.5 ; R7.2 19.79,44.51 20.8,43.5 ; v1(21.5,44.3) 20.8,43.6 20.8,43.5
NetC10_2: C10.2 DD2.25 R13.2 | length 21
  Top Layer w0.4: v1(29.9,29.7) 30.5,30.3 30.5,30.6 ; C10.2 30.5,30.6 ; DD2.25 31.05,30.05 30.5,30.6
  Bottom Layer w0.4: R13.2 22.6,24.1 23.1,24.6 28.3,24.6 29.625,25.925 29.625,25.986 ; 29.039,25.4 29.625,25.986 ; v1(29.9,29.7) 29.4,29.2 29.4,28.15 29.3,28.05 29.3,27.139 29.625,26.814 29.625,25.986
NetC13_2: C13.2 DD2.7 G1.2 | length 12.8
  Top Layer w0.4: G1.2 34.8,16 38.25,19.45 DD2.7
  Bottom Layer w0.4: G1.2 34.25,16 C13.2
NetC14_2: C14.2 DD2.8 G1.1 | length 10.2
  Top Layer w0.4: G1.1 39.05,17.61 DD2.8 DD2.8@39.1,23
  Bottom Layer w0.4: G1.1 38,16 38.75,16.75 C14.2
NetC15_2: C15.2 F1.2 L2.1 VD3.1 | length 10.4
  Top Layer w0.7: L2.1 21,50.9 ; C15.2 21,50.9 ; F1.2 27.9,48.5 26.05,50.35 VD3.1 22.45,50.35 21.9,50.9 21,50.9
NetC16_2: C16.2 L2.2 R23.2 | length 4.9
  Top Layer w0.7: R23.2 18.3,51.7 ; C16.2 18.3,51.7 ; L2.2 18.3,50.2 18.3,51.7
NetC17_2: C17.2 L1.1 R23.1 VD4.1 | length 8.7
  Top Layer w0.7: L1.1 12.2,47.9 13.2,48.9 VD4.1 14.9,50.1 16.21,51.41 R23.1 16.21,53.44 C17.2
NetC19_2: C19.2 R16.2 R24.1 VD5.1 | length 6.4
  Top Layer w0.4: R16.2@14.4,22.39 15.99,22.39 VD5.1 16.1,22.5 R24.1 18.34,24.91 C19.2
NetC20_2: C20.2 R25.2 R26.1 VD5.2 | length 10.9
  Top Layer w0.4: v1@12.825,21.075 v1(12.775,21.025) 13.61,20.19 R25.2 15.69,20.19 VD5.2 C20.2
  Bottom Layer w0.4: v1(12.775,21.025) 13.3,21.55 R26.1
NetC21_2: C21.2 R27.2 R28.1 VD6.1 VD6.2 | length 16.8
  Bottom Layer w0.4: VD6.1@6.8,15.425 VD6.1 7.825,15.5 ; R28.1 7.8,15.525 7.825,15.5 ; C21.2 13.74,12.95 R27.2 13.69,11.91 13.325,11.545 9.946,11.545 8.775,12.716 VD6.2 7.825,15.5
NetDA1_3: DA1.3 R5.1 | length 2.7
  Bottom Layer w0.4: DA1.3 20.7,31.8 20.8,31.9 20.8,32.59 R5.1
  Bottom Layer w0.5: DA1.3@20.47,30.5 DA1.3
NetDA2_1: DA2.1 R1.1 R6.1 R10.2 R24.2 | length 20.1
  Top Layer w0.4: DA2.1 12.9,28 13,27.9 15.84,27.9 R10.2 R10.2@16.06,28 ; R24.2 16.1,27.96 R10.2@16.06,28 ; R1.1 25.71,34.2 24.1,34.2 23.9,34 R6.1 19.78,31.98 18.5,30.7 18.42,30.7 17.2,29.48 17.2,28.2 17,28 R10.2@16.06,28
NetDA2_2: DA2.2 R9.3 | length 16.1
  Top Layer w0.4: DA2.2 14.54,30.16 v1(14.6,30.1)
  Bottom Layer w0.4: R9.3 13.5,35.8 15.7,33.6 15.7,32.244 15.628,32.172 15.628,31.592 15.7,31.52 15.7,31.356 14.6,30.256 v1(14.6,30.1)
NetDA2_3: DA2.3 R5.2 | length 7
  Top Layer w0.4: DA2.3 15.43,31.43 16.4,32.4 v1(18.2,32.4)
  Bottom Layer w0.4: v1(18.2,32.4) 18.4,32.6 R5.2
NetDA2_5: DA2.5 R6.2 | length 5.5
  Top Layer w0.4: DA2.5 12.93,34 R6.2
NetDA2_6: DA2.6 R11.1 R12.2 | length 6.6
  Top Layer w0.35: DA2.6 14.36,35.24 14.5,35.1 15.69,35.1 R11.1
  Top Layer w0.4: v1@11.1,35.3 v1(11.16,35.24) DA2.6
  Bottom Layer w0.4: R12.2 9.41,35.9 10.5,35.9 v1@11.1,35.3
NetDA2_7: DA2.7 R3.1 R11.2 R26.2 | length 20
  Top Layer w0.4: DA2.7 15.68,36.51 R11.2 19.8,36.49 R3.1
  Bottom Layer w0.4: R26.2 13.3,27.5 14.6,28.8 16.3,28.8 17.8,30.3 17.8,30.9 17.3,31.4 17.1,31.6 17.1,32.1 17.1,35 17.7,35.6 v1(17.7,36.5)
NetDA2_8: DA2.8 DA2.9 R13.1 R28.2 | length 28.1
  Top Layer w0.4: DA2.8 DA2.9 8.66,35.24 9,34.9 9,28.5 ; v1(7.9,27.6) 8.1,27.6 9,28.5 ; v1(14.7,26.1) 13.6,27.2 10.3,27.2 9,28.5
  Bottom Layer w0.4: R28.2 7.8,22.5 7.9,22.6 v1(7.9,27.6) ; v1(14.7,26.1) 14.6,26.1 14.6,25.1 15.6,24.1 R13.1
NetDA2_10: DA2.10 DA4.2 | length 2.8
  Top Layer w0.4: DA4.2 5.17,33.97 DA2.10
NetDA3_2: DA3.2 R4.1 R8.2 | length 9.8
  Top Layer w0.4: R4.1 25.29,43.41 25.75,42.95 DA3.2 27.45,42.95 28.1,43.6 28.1,44.4 30.2,46.5 R8.2
NetDD1_2: DD1.2 R15.2 | length 2.5
  Top Layer w0.4: DD1.2 21.06,15.41 21.55,15.9 21.5,15.95 R15.2
NetDD1_3: DD1.3 R20.2 | length 2.4
  Top Layer w0.4: R20.2 19.5,16.1 19.79,15.81 DD1.3
NetDD1_5: DD1.5 R18.1 R22.1 VD2.2 | length 23.5
  Top Layer w0.4: R18.1 18.419,8.95 DD1.5 18.5,8.829 v1(18.5,6.625)
  Bottom Layer w0.4: v1(18.5,6.625) 19.99,5.135 25.78,5.135 26.7,6.055 26.7,7 27.2,7.5 VD2.2 28.7,7.5 29.4,8.2 29.4,11.3 29.5,11.4 29.5,12.11 R22.1
NetDD1_6: DD1.6 R21.1 VD2.1 X6.1 | length 18.2
  Top Layer w0.4: X6.1 19.79,4.75 DD1.6
  Bottom Layer w0.4: X6.1 26.2,3.5 26.9,4.2 28,4.2 ; VD2.1 28,4.2 ; R21.1 28,3.01 28,4.2
NetDD1_7: DD1.7 R19.1 VD1.2 X5.2 | length 22.4
  Top Layer w0.4: DD1.7 21.06,6.64 21.55,6.15 VD1.2 21.55,4.55 22,4.1 25.99,4.1 27.89,2.2 v1(31.5,2.2) ; v1(21.1,6.8) 21.2,6.8 v1@21.3,6.7 ; X5.2@24.965,6.535 X5.2 X5.2@25.275,6.46
  Bottom Layer w0.4: v1(21.1,6.8) 21,6.9 21,7 21.465,6.535 X5.2 ; v1(31.5,2.2) 32.52,2.2 R19.1
NetDD1_8: DD1.8 R14.1 R17.1 VD1.1 | length 29.8
  Top Layer w0.4: R17.1@28.075,12.15 R17.1 28.025,13.375 27.7,13.7 24.1,13.7 22.5,12.1 22.5,9.019 DD1.8 22.33,7.37 23.45,6.25 VD1.1 23.615,5.135 26.335,5.135 28.375,7.175 v1(35.875,7.175)
  Bottom Layer w0.4: v1@35.825,7.325 35.825,7.175 35.875,7.125 v1(35.875,7.175) R14.1
NetDD2_13: DD2.13 R30.1 | length 8.6
  Top Layer w0.4: DD2.13 42.75,27.65 v1(42.8,27.7)
  Bottom Layer w0.4: R30.1 40.7,29.8 v1(42.8,27.7)
NetDD2_15: DD2.15 X4.4 | length 7.2
  Top Layer w0.4: DD2.15 43.9,29.25 v1@44.225,29.575
  Bottom Layer w0.4: v1@44,29.35 44,29.45 44.51,29.96 X4.4
  other v1: 43.7,29.4
NetDD2_16: DD2.16 X4.2 | length 9.6
  Top Layer w0.4: DD2.16 40.606,30.05 43.8,33.244 v1@43.8,34.9
  Bottom Layer w0.4: v1@43.8,34.9 43.94,35.04 X4.2
  other v1: 43.7,34.4
NetDD2_17: DD2.17 X4.3 | length 9.1
  Top Layer w0.4: DD2.17 39.5,31.45 40.4,32.35 40.95,32.35 41.9,33.3 v1(42.1,33.1)
  Bottom Layer w0.4: v1(42.1,33.1) 42.8,32.4 46.9,32.4 X4.3
NetDD2_30: DD2.30 R15.1 VD7.2 | length 17.5
  Top Layer w0.4: R15.1 21.5,19.675 21.6,19.575 v1(21.625,19.575) ; VD7.2 23.9,23.95 ; v1(23.9,23) 23.9,23.95 ; DD2.30 30.906,26.05 28.806,23.95 23.9,23.95
  Bottom Layer w0.4: v1(21.625,19.575) 21.625,20.725 v1(23.9,23)
NetDD2_31: DD2.31 R20.1 VD7.1 | length 16.7
  Top Layer w0.4: R20.1 19.5,20 21.55,22.05 VD7.1 23.25,22.05 23.4,21.9 24.356,21.9 25.056,22.6 28.446,22.6 31.096,25.25 DD2.31
NetF1_1: F1.1 X3.2 | length 10.2
  Bottom Layer w0.7: F1.1 28,53.54 32.96,53.54 X3.2@38.04,53.54
NetR7_1: R7.1 R9.1 | length 2.6
  Bottom Layer w0.4: R7.1 18.4,45.54 18.4,44.9 18.58,44.72 R9.1
NetR9_2: R9.2 R10.1 | length 11.6
  Top Layer w0.4: R10.1 16,30.2 16.2,30.4 16.4,30.4 16.5,30.5 v1(16.5,30.6)
  Bottom Layer w0.4: R9.2 16,40.42 16.4,40.02 16.4,32.79 16.4,31.954 16.328,31.882 16.4,31.81 16.4,30.7 v1(16.5,30.6)
NetR14_2: R14.2 X2.1 | length 5.2
  Bottom Layer w0.4: X2.1@38.44,4.65 38.44,6.465 38.575,6.6 38.575,7.165 R14.2 38.44,7.3 X2.1@38.44,9.73
NetR16_1: R16.1 X1.2 | length 9.3
  Top Layer w0.4: X1.2@5.425,23.055 10.505,23.055 11.655,23.055 12.39,23.79 R16.1
NetR17_2: R17.2 X5.1 | length 3.2
  Top Layer w0.4: R17.2 25.125,9.15 X5.1
NetR18_2: R18.2 X6.2 | length 3.1
  Top Layer w0.4: R18.2 14.625,6.025 14.625,4.875 X6.2
NetR19_2: R19.2 X2.2 | length 9
  Bottom Layer w0.4: R19.2 35,2.7 35.9,3.6 35.9,4.65 34.65,5.9 34.65,8.48 X2.2@35.9,9.73
NetR21_2: R21.2 X2.3 | length 9.7
  Bottom Layer w0.4: R21.2 30,3 30.3,3.3 32.01,3.3 33.36,4.65 X2.3@33.36,9.73
NetR22_2: R22.2 X2.4 | length 9.4
  Bottom Layer w0.4: R22.2 30.82,12.13 30.82,9.73 30.845,9.73 32.5,8.075 32.5,6.33 30.82,4.65 X2.4@31.35,4.65
NetR25_1: R25.1 X1.4 | length 9.5
  Top Layer w0.35: X1.4@5.425,17.975 X1.4@10.505,17.975
  Top Layer w0.4: X1.4@10.505,17.975 10.695,17.785 11.72,18.81 R25.1
NetR27_1: R27.1 X1.6 | length 6.9
  Top Layer w0.4: X1.6@5.425,12.895 X1.6@10.505,12.895
  Bottom Layer w0.4: X1.6@10.505,12.895 12.305,12.895 R27.1
NetR29_1: R29.1 VD8.2 | length 4.5
  Top Layer w0.4: R29.1 33.9,44.11 33.9,46.7 34.7,47.5 VD8.2
NetR30_2: R30.2 VD9.2 | length 3.4
  Top Layer w0.4: v1(41.4,35.5) 41.4,36.55 41.7,36.85 VD9.2
  Bottom Layer w0.4: R30.2 40.7,34.8 v1(41.4,35.5) 41.4,35.8 v1@41.5,35.9
pads on no net: DA2.12 DA2.13 DA2.14 DD2.1 DD2.2 DD2.9 DD2.10 DD2.11 DD2.14 DD2.19 DD2.22 DD2.26 DD2.27 DD2.28 DD2.32

## Polygon pours and split planes (outlines as drawn)
GND on Bottom Layer "GRoT" (solid, pour order 18): 12.5,56 39.5,56 41.5,54 41.5,47.5 48.5,47.5 50.5,45.5 50.5,22.5 48.5,20.5 42,20.5 41.5,20 41.5,3.5 39.5,1.5 12.5,1.5 10.5,3.5 10.5,10.845 10.345,11 3.5,11 1.5,13 1.5,35.5 3.5,37.5 10,37.5 10.5,38 10.5,54
GND on Top Layer "GRoT" (solid, pour order 20): 12.395,55.925 39.395,55.925 41.395,53.925 41.395,47.425 48.395,47.425 50.395,45.425 50.395,22.425 48.395,20.425 41.895,20.425 41.395,19.925 41.395,3.425 39.395,1.425 12.395,1.425 10.395,3.425 10.395,10.77 10.24,10.925 3.395,10.925 1.395,12.925 1.395,35.425 3.395,37.425 9.895,37.425 10.395,37.925 10.395,53.925

## Keep-outs
Keep-Out Layer:
  lines w1.2: 0,9.25 0,39 9.25,39 9.25,58 42.75,58 42.75,48.75 52,48.75 52,19 42.75,19 42.75,0 9.25,0 9.25,9.25 0,9.25

## Silkscreen, mask and mechanical layers (free items; w line width, h text height)
Mechanical 2:
  lines w0.01: 0,9.25 9.25,9.25 9.25,0 42.75,0 42.75,19 52,19 52,48.75 42.75,48.75 42.75,58 9.25,58 9.25,39 0,39 0,9.25
  lines w1.2: 0,9.25 9.25,9.25 9.25,0 42.75,0 42.75,19 52,19 52,48.75 42.75,48.75 42.75,58 9.25,58 9.25,39 0,39 0,9.25
Mechanical 3:
  lines w0.3: 10.25,3.15 10.25,3.15 ; 10.25,3.15 10.25,3.25 10.25,3.5 10.25,9 10.25,9.25 10.25,9.75 10.25,10.15 10.05,10.35 9.65,10.35 3.25,10.35 1,12.6 1,35 1,35.7 3.25,37.95 3.3,38 3.5,38 10,38 10.2,38.2 10.2,54.2 12.45,56.45 39.454,56.45 39.546,56.45 41.75,54.246 41.75,47.75 48.7,47.75 50.95,45.5 51,45.45 51,45.2 51,22.3 51,22.2 48.8,20 42,20 ; 10.25,3.15 12.5,0.9 39.6,0.9 41.75,3.05 41.75,19.401 41.75,19.501 41.75,19.75 42,20 ; 42,20 42,20
Mechanical 4:
  text "Hall" at 25.075,29.375 h0.8
  text "Sensor" at 24.125,27.925 h0.8
  text "1" at 35.15,11.9 h0.8 r90
Mechanical 8:
  lines w0.15: -0.5,19 51.5,19 ; 0,6.5 0,40.25 ; 0,29 52,29 ; 0,48.75 52.75,48.75 ; 0.25,9.25 52.25,9.25 ; 0.25,39 53,39 ; 6.5,66 6.5,65.75 6.75,65.5 ; 9.25,0 9.25,59.5 ; 26,0 26,59.5 ; 42.75,0 42.75,59.5 ; 51.75,57.5 52,57.75 52,0 0,0 0,58 52.75,58 ; 52,16.25 52,50
Mechanical 13:
  lines w0.15: 21,37 25,37

## Dimensions
3.25,10.35 to 10.05,10.35 on Mechanical 13
3.25,10.35 to 25.981,29.019 on Mechanical 13
10.25,10.15 to 10.05,10.35 on Mechanical 13
10.05,10.35 to 25.981,29.019 on Mechanical 13
9.25,0 to 52,0 on Mechanical 8
52,29 to 53,39 on Mechanical 8
0,0 to 9.25,0 on Mechanical 8
9.25,59.5 to 42.75,59.5 on Mechanical 8
0,0 to 26,0 on Mechanical 8
0,0 to 0,48.75 on Mechanical 8
0,0 to 0.25,9.25 on Mechanical 8
0,58 to 0,0 on Mechanical 8
-0.5,19 to 0.25,39 on Mechanical 8
0,0 to -0.5,19 on Mechanical 8

## Text inside footprints (layer, text, board x,y; h text height)
DD1: Mechanical 13 "*" at 21.581,13.605 h0.8 r270; Mechanical 4 "*" at 22.475,16.25 h0.8 r270
X1: Mechanical 4 "1" at 13.8,25.5 h0.8
X2: Mechanical 4 "1" at 40.4,4.9 h0.8
X3: Mechanical 4 "1" at 39.5,50 h0.8
X5: Mechanical 4 "1" at 24,9.5 h0.8
X6: Mechanical 4 "1" at 20.25,2.65 h0.8 r180